# Altium PCB TemperatureController.PcbDoc
Units mil, origin at the board's own origin, x right, y up, seen from the top; angles counter-clockwise.
Board outline 4500 x 3715 mil, 2 copper layers (Top Layer, Bottom Layer); 24 components, 18 nets, 92 pads, 7 vias.
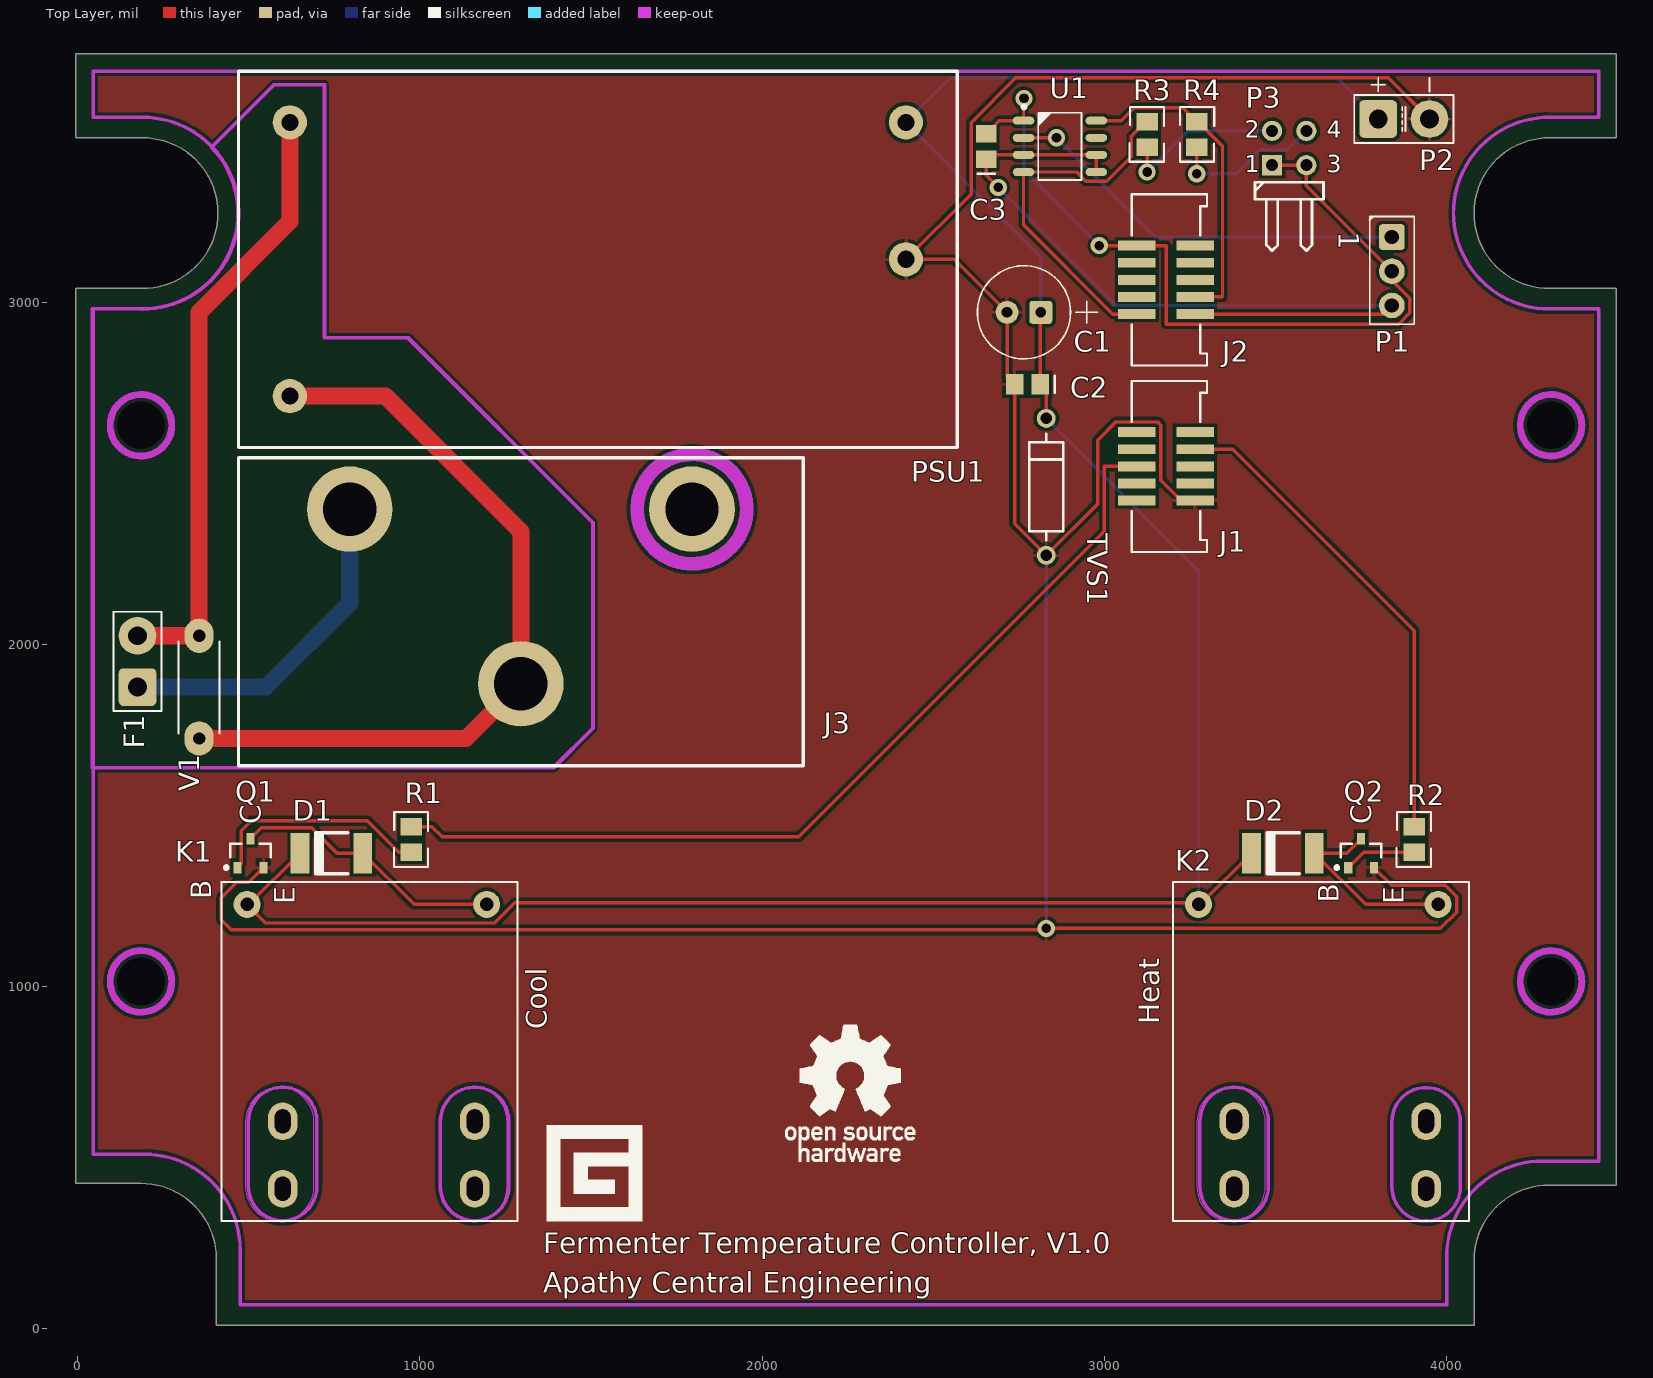
[diagram p0: Top Layer view]
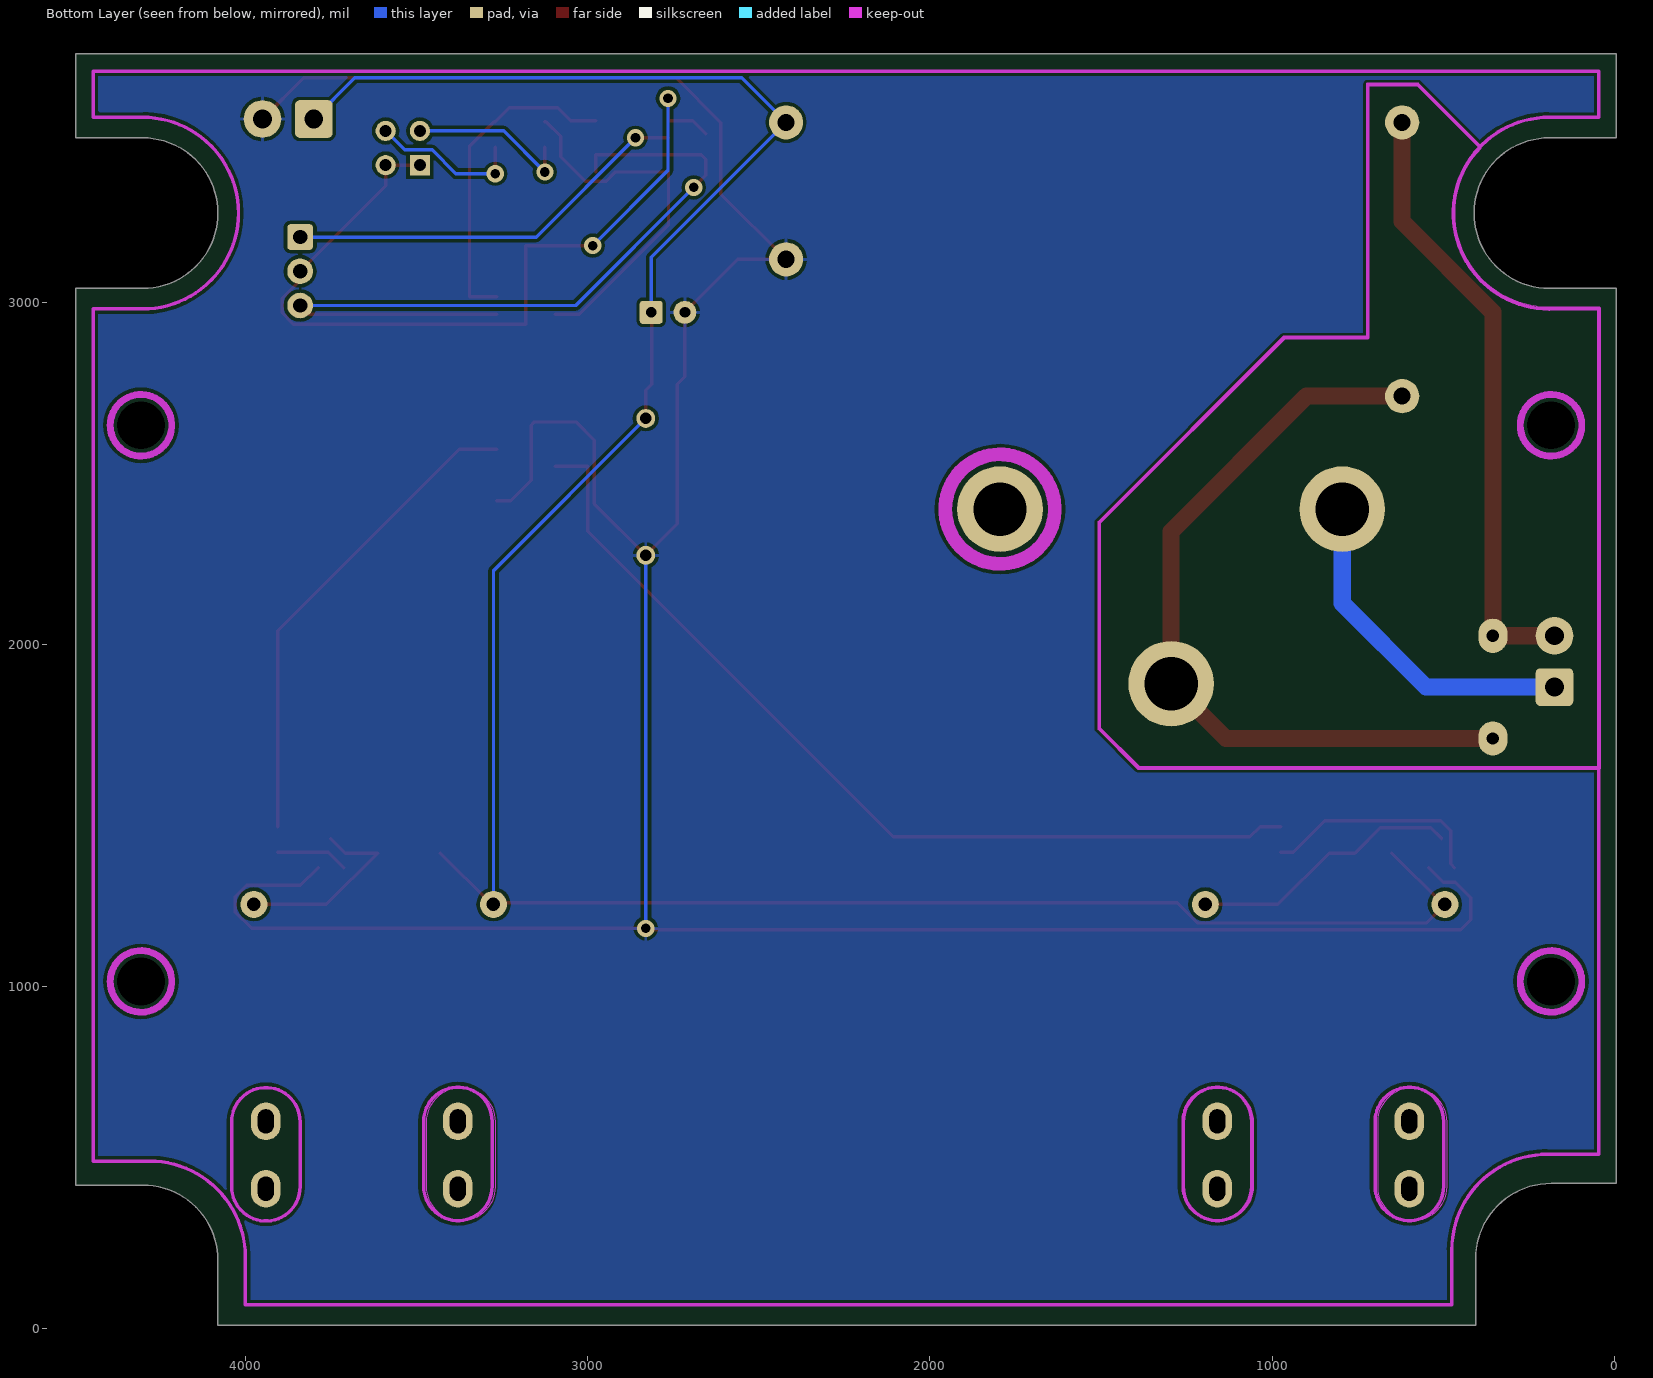
[diagram p1: Bottom Layer view, seen from below]

## Layer stack, top to bottom
Top Layer: signal copper 1.4
Dielectric: core 12.6, FR-4, Dk 4.8
Bottom Layer: signal copper 1.4

## Board outline
-5,425 185,425 cw(c185,205) 405,205 405,10 4080,10 4080,200 cw(c4300,200) 4300,420 4495,420 4495,3040 4300,3040 cw(c4300,3260) 4080,3260 cw(c4300,3260) 4300,3480 4495,3480 4495,3725 -5,3725 -5,3480 190,3480 cw(c190,3260) 410,3260 cw(c190,3260) 190,3040 -5,3040

## Design rules (kind name [scope] priority, off if disabled: settings)
Clearance [All] p1: gap=10
HoleSize [All] p1: absolutevalues=TRUE maxlimit=160 minlimit=1 maxpercent=80.000 minpercent=20.000
PolygonConnect [All] p1: connectstyle=Relief reliefconductorwidth=10 reliefentries=4 polygonreliefangle="90 Angle" airgapwidth=10
RoutingVias [All] p1: holewidth=32 width=62 viastyle="Through Hole" minholewidth=28 minwidth=50 maxholewidth=28 maxwidth=50
SilkToSolderMaskClearance [IsPad] p1: minsilkscreentomaskgap=9 clearancetoexposedcopper=TRUE
SolderMaskExpansion [All] p1: expansion=4
Width [(InNet('AC-LINE') OR InNet('AC-NEUTRAL') OR InNet('AC_LINE PRE-FUSE'))] p1: maxlimit=60 minlimit=50 preferedwidth=50 minimp=50.000000 maximp=50.000000 favimp=50.000000
26 further rules are at their usual default settings.

## Components (designator, comment, footprint, x,y, rotation, side; value= is the part's Value field where it differs from the comment)
C1 "Capacitor, Polarized Axial" CAPAxial680X1220_VERT 2765,2970 r180 top
C2 "Bypass Cap" "0805 [2012]" 2775,2760 r180 top
C3 "Bypass Cap" "0805 [2012]" 2655,3455 r90 top
D1 "SMD Diode" "Diode (3mm X 1mm X 4.65mm) SMD" 650,1390 r90 top
D2 "SMD Diode" "Diode (3mm X 1mm X 4.65mm) SMD" 3430,1390 r90 top
F1 "Panel Mount Fuze" "Off Board Connector" 175,1875 r180 top
J1 "SHF-105-01-J-D-SM" "Samtec SHF-105-01-J-D-SM" 3180,2520 r0 top
J2 "SHF-105-01-J-D-SM" "Samtec SHF-105-01-J-D-SM" 3180,3065 r0 top
J3 "Barrier Strip" "Molex 3 Pos Barrier Strip" 1795,2395 r270 top
K1 "Cool Relay" "Omron G5CA-1A-TP" 845,1240 r0 top
K2 "Heat Relay" "Omron G5CA-1A-TP" 3625,1240 r0 top
P1 "1x3 Header" "1x3 Pos Header" 3775,3250 r0 top
P2 "Barrel Power Plug" "Power Plug" 3875,3535 r90 top
P3 "Header 2X2H" HDR2X2H 3490,3400 r0 top
PSU1 "VSK-S10-12UA" VSK-S10-12UA 620,3525 r0 top
Q1 "MMBT3904" SOT-23 505,1390 r90 top
Q2 "MMBT3904" SOT-23 3750,1390 r90 top
R1 "10k" RES_0805 975,1430 r90 top
R2 "10k" RES_0805 3905,1430 r90 top
R3 "4.7 K" RES_0805 3125,3490 r90 top
R4 "4.7 K" RES_0805 3270,3490 r270 top
TVS1 "P6KE-20A" "DIODE Axial 400 mil" 2830,2460 r90 top
U1 "DS2482-100" DS2482-100 2870,3455 r0 top
V1 "MOV" Varistor_7.62and10mm 355,1875 r90 top

## Footprints (in the part's own frame and the unit in brackets; to place one, negate y for a bottom-side part, rotate by r counter-clockwise, add the part's x,y. Pads: shape width x height; smd on the part's side, far side on the other; paste and mask are expansions set on the pad)
"1x3 Pos Header" [mil] "Connector Header, Single-row 3-position, 0.100\" pitch"
  rrect25% 75x75 hole 42: 1(65,-60)
  round 75 hole 42: 2(65,-160) 3(65,-260)
  silkscreen extent 0,-315 130,0, body extent 8,-310 122,-10, height 267
"0805 [2012]" [mm] "Chip Capacitor; Body 2.0 x 1.2 mm (LxW typ)"
  rect 1.3x1.5 smd: 1(-0.95,0) 2(0.95,0)
  silkscreen extent -2.03,-0.64 -2.03,0.63, body extent -1.52,-0.64 1.52,0.64, height 0.38
CAPAxial680X1220_VERT [mm] "Capacitor, Polarized Axial"
  round 0.508 on Mech14: 0(0,0)
  rrect25% 1.7x1.7 hole 0.8: 1(-1.25,0)
  round 1.7 hole 0.8: 2(1.25,0)
  silkscreen extent -5.45,-3.46 3.46,3.46, body extent -3.37,-3.37 3.37,3.37, height 12.2
"Diode (3mm X 1mm X 4.65mm) SMD" [mil]
  rect 118.11x55 smd: 1(0,0) 2(0,-183.07)
  silkscreen extent -60,-140 60,-45, body extent -65,-187 65,10, height 40
"DIODE Axial 400 mil" [mm] "Diode, Thru-Hole; 2 Leads; 0.4 in Pin Spacing"
  round 1.4 hole 0.85: 1(-5.08,0) 2(5.08,0)
  silkscreen extent -3.94,-1.27 3.94,1.27, body extent -5.33,-1.27 5.33,1.26, height 2.54
DS2482-100 [mm]
  round 1 on Mech14: 0(0,0)
  oval 1.6x0.6 smd paste-2: 1(-2.7,1.905) 2(-2.7,0.635) 3(-2.7,-0.635) 4(-2.7,-1.905) 5(2.7,-1.905) 6(2.7,-0.635) 7(2.7,0.635) 8(2.7,1.905)
  silkscreen extent -2.79,-2.5 1.6,3.05, body extent -3,-2.45 3,2.45, height 1.75
HDR2X2H [mm] "Connector; Header; 2x2 Position; Right Angle"
  rect 1.5x1.5 hole 0.9: 1(0,0)
  round 1.5 hole 0.9: 2(0,2.54) 3(2.54,0) 4(2.54,2.54)
  silkscreen extent -1.27,-6.35 3.81,-1.27
"Molex 3 Pos Barrier Strip" [mil]
  round 250 hole 156: 1(0,-1000) 2(510,-500) 3(0,0)
  silkscreen extent -150,-1325 750,325, body extent -125,-1290 725,310, height 890
"Off Board Connector" [mil] "2 Position Off Board Connector"
  rrect25% 110x110 hole 55: 1(0,0)
  round 110 hole 55: 2(0,-150)
  silkscreen extent -70,-220 70,70
"Omron G5CA-1A-TP" [mm] "Omrom G5CA-1A-TP PCB Relay"
  round 2 hole 1: 1(-8.89,0) 2(8.89,0)
  oval 2.2x2.8 hole 1.2 slot 1.8 at 90 deg: 3(-6.25,-21.1) 3(-6.25,-16.1) 4(8,-21.1) 4(8,-16.1)
  silkscreen extent -10.79,-23.49 11.18,1.65, body extent -10.79,-23.62 11.18,1.65, height 13.3
"Power Plug" [mil]
  rrect25% 110x110 hole 55: V+(0,75)
  round 110 hole 55: V-(0,-75)
  silkscreen extent -70,-145 120,145
RES_0805 [mm] "Resistor -  2 x 1.4 mm (LxDia)"
  rect 1.3x1.6 smd: 1(-0.95,0) 2(0.95,0)
  silkscreen extent -2.03,-1.24 2.03,1.3, body extent -1.4,-0.79 1.4,0.79, height 0.76
"Samtec SHF-105-01-J-D-SM" [mil] "Samtec Gadgeteer Connector"
  rect 110x29 smd: 1(-85,100) 2(85,100) 3(-85,50) 4(85,50) 5(-85,0) 6(85,0) 7(-85,-50) 8(85,-50) 9(-85,-100) 10(85,-100)
  silkscreen extent -100,-250 120,250, body extent -120,-250 120,250
SOT-23 [mm] "SOT23, 3-Leads, Body 2.9x1.3mm, Pitch 0.95mm, Lead Span 2.5mm, IPC High Density"
  rect 0.85x0.6 smd: 1(-1.075,-0.95) 2(-1.075,0.95) 3(1.075,0)
  silkscreen extent -1.2,-1.5 0.7,1.92, body extent -0.7,-1.5 0.7,1.5, height 1.1
Varistor_7.62and10mm [mil] "MOV Thru-Hole, Radial; Body 6.8 x 3 mm (WxT) Pin Spacing 7.62 mm (typ)"
  oval 100x85 hole 36: 1(-150,0) 2(150,0)
  silkscreen extent -135,-60 133,60, body extent -216,-70 216,68, height 472
VSK-S10-12UA [mil] "CUI AC-DC Power Supply"
  round 100 hole 50: 1(0,0) 2(0,-800) 3(1800,0) 4(1800,-400)
  silkscreen extent -150,-950 1950,150, body extent -155,-955 1955,155, height 748

## Part data
C1: "120 uF Aluminum Electrolytic Capacitor (Axial)"
C2 C3: library part "Bypass Capacitor", "0.1 uF Capacitor SMD 0805"
D1 D2: library part diode, "Diode, SMD, 0805"
F1: library part "Panel Mount Fuse Holder", "Panel Mount Fuze Holder"
J1 J2: "Samtec 10 pin .050 pitch shrouded connector"
J3: library part "Molex 3 Pos Barrier Strip", "Molex 3 Pos Barrier Strip"
K1 K2: library part G5CA-1A-TP-E, "Omron G5CA-1A-TP-E PCB Mount 12 V Relay with 15A contacts"
P1: "Fan Connector Header, Single-row 3-position, 0.100\" pitch"
P2: library part "Barrel Plug", "Power Plug"
P3: "Header, 2-Pin, Dual row, Right Angle"
PSU1: "AC/DC 12V Sealed PCB Mount Power Supply"
Q1 Q2: "NPN General Purpose Amplifier"
R1 R2 R3 R4: library part "RES 0805"
TVS1: library part "TVS Diode", "Diode, TVS, Axial"
U1: library part DS2482, "I2C to 1-Wire Bridge, SO(150mil)"
V1: "Metal Oxide Varistor"

## Free pads (board coordinates)
  round 130 hole 140 unplated: M1(185,1015) M1(185,2640) M1(4305,1015) M1(4305,2640)

## Via types
v1: diameter 50, hole 28, Top Layer to Bottom Layer, 7 vias

## Nets (pads, with @x,y where several pads share a name; then routed paths per layer and width w, separated by ;. In a path a pad name is that pad's centre, name@x,y a point inside that pad or via, vN(x,y) a via of type N, cw(c..) or ccw(c..) an arc to the next point about the centre after c; other vN are vias at no path point)
"1WIRE IO": P1.1 U1.2 | length 1196.4
  Top Layer w10: U1.2 v1(2860,3480)
  Bottom Layer w10: v1(2860,3480) 3150,3190 P1.1
AC-LINE: F1.2 PSU1.1 V1.2 | length 1789.8
  Top Layer w50: F1.2 V1.2 355,2970.48 620,3235.48 PSU1.1
AC-NEUTRAL: J3.2 PSU1.2 V1.1 | length 2289.9
  Top Layer w50: V1.1 1135,1725 J3.2 1295,2330 900,2725 PSU1.2
"AC_LINE PRE-FUSE": F1.1 J3.1 | length 996.5
  Bottom Layer w50: F1.1 550,1875 795,2120 J3.1
GND: C1.2 C2.2 J1.10 P2.V- PSU1.4 Q1.1 Q2.1 TVS1.1 | length 9212.6
  Top Layer w10: Q1.1 499.72,1305 465,1305 420,1260 420,1195 449.37,1165.63 2825.63,1165.63 v1(2830,1170) 3981.89,1170 4029.37,1217.48 4029.37,1262.52 3996.08,1295.81 3839.26,1295.81 Q2.1 ; J1.10 3224.29,2420 3165,2479.29 3165,2640.71 3156.21,2649.5 3033.79,2649.5 2980,2595.71 2980,2410 TVS1.1 2737.6,2352.4 C2.2 2715.79,2781.81 C1.2 2560.79,3125 PSU1.4 2610.47,3315.47 2610.47,3524.21 2741.27,3655 3830,3655 P2.V-
  Bottom Layer w10: v1(2830,1170) TVS1.1
GND_3V3: C3.1 J2.10 P1.3 U1.3 U1.5 U1.6 | length 2351.8
  Top Layer w10: v1(2690,3335) 2655,3370 C3.1 2667.4,3430 U1.3 U1.6 U1.5 ; J2.10 3815,2965 P1.3
  Bottom Layer w10: v1(2690,3335) 3035,2990 P1.3
NetD1_2: D1.2 K1.2 Q1.3 | length 796.4
  Top Layer w10: Q1.3 505,1433.11 535.94,1464.06 683.71,1464.06 757.77,1390 D1.2 983.07,1240 K1.2
NetD2_2: D2.2 K2.2 Q2.3 | length 578.5
  Top Layer w10: Q2.3 3707.68,1390 D2.2 3763.07,1240 K2.2
NetJ1_4: J1.4 R2.2 | length 1432.1
  Top Layer w10: J1.4 3375,2570 3905,2040 R2.2
NetJ1_5: J1.5 R1.2 | length 2692.2
  Top Layer w10: R1.2 1035,1467.4 1065,1437.4 2107.4,1437.4 3000,2330 3000,2520 J1.5
NetP3_2: P3.2 R3.1 | length 487.3
  Top Layer w10: v1(3125,3380) R3.1
  Bottom Layer w10: v1(3125,3380) 3245,3500 P3.2
NetP3_4: P3.4 R4.2 | length 449.4
  Top Layer w10: v1(3270,3375) R4.2
  Bottom Layer w10: v1(3270,3375) 3384.73,3375 3454.26,3444.53 3534.53,3444.53 P3.4
NetQ1_2: Q1.2 R1.1 | length 658.6
  Top Layer w10: Q1.2 478.19,1358.27 478.19,1455.27 506.98,1484.06 846.78,1484.06 938.24,1392.6 R1.1
NetQ2_2: Q2.2 R2.1 | length 211
  Top Layer w10: Q2.2 3757.52,1392.6 R2.1
SCL: J2.9 R3.2 U1.4 | length 1072.8
  Top Layer w10: J2.9 3025,2965 2763.7,3226.3 U1.4 2918.7,3380 2945.51,3353.19 3007.09,3353.19 3078.5,3424.6 3078.5,3484.4 3121.5,3527.4 R3.2
SDA: J2.8 R4.1 U1.8 | length 951.8
  Top Layer w10: U1.8 3049.3,3530 3087.29,3567.99 3229.41,3567.99 R4.1 3273.5,3527.4 3345,3455.9 3345,3015 J2.8
VCC_3V3: C3.2 J2.1 P1.2 P3.1 P3.3 U1.1 | length 2518.3
  Top Layer w10: C3.2 2692.6,3530 U1.1 2763.7,3593.7 v1(2765,3595) ; v1(2985,3165) J2.1 3180,3165 3180.5,3164.5 3180.5,2935.5 3859.75,2935.5 3892.5,2968.25 3892.5,3011.75 3840,3064.25 P1.2 3590,3340 P3.3 P3.1
  Bottom Layer w10: v1(2765,3595) 2765,3385 v1(2985,3165)
VCC_12V: C1.1 C2.1 D1.1 D2.1 K1.1 K2.1 P2.V+ PSU1.3 TVS1.2 | length 7407.9
  Top Layer w10: D1.1 500,1240 K1.1 549.37,1185.63 1217.52,1185.63 1276.89,1245 3270,1245 K2.1 ; C1.1 2812.4,2968.19 C2.1 2830,2742.4 TVS1.2 ; K2.1@3275,1245 3285,1245 D2.1
  Bottom Layer w10: TVS1.2 3275,2215 K2.1 ; C1.1@2830,2954.21 C1.1 2814.21,3130.79 PSU1.3 2550,3655 3680,3655 P2.V+
pads on no net: C1.0 J1.1 J1.2 J1.3 J1.6 J1.7 J1.8 J1.9 J2.2 J2.3 J2.4 J2.5 J2.6 J2.7 J3.3 K1.3 K1.4 K2.3 K2.4 U1.0 U1.7

## Polygon pours and split planes (outlines as drawn)
GND on Top Layer "Bottom Layer -Gnd" (solid, pour order 6): 45,510.04 194.96,510.04 cw(c194.96,230) 475,230 475,70 4000,70 4000,210 cw(c4280.04,210) 4280.04,490.04 4445,490.04 4445,2980 4300.04,2980 4300,2979.96 cw(c4300,3260) 4300,3540.04 4445,3540 4445,3675 45,3675 45,3540.04 190,3540.04 cw(c190,3260) 190,2979.96 45.04,2979.96 45,2979.91
GND on Bottom Layer "Bottom Layer -Gnd" (solid, pour order 4): 45,510.04 194.96,510.04 cw(c194.96,230) 475,230 475,70 4000,70 4000,210 cw(c4280.04,210) 4280.04,490.04 4445,490.04 4445,2980 4300.04,2980 4300,2979.96 cw(c4300,3260) 4300,3540.04 4445,3540 4445,3675 45,3675 45,3540.04 190,3540.04 cw(c190,3260) 190,2979.96 45.04,2979.96 45,2979.91

## Keep-outs
Keep-Out Layer:
  circle w40: c1795,2395 r160
  circle w20: c4305,1015 r90
  circle w20: c185,1015 r90
  circle w20: c4305,2640 r90
  circle w20: c185,2640 r90
  pour cut-out: 45,1634.98 cw(c45,1640) 39.98,1640 39.98,2979.91 cw(c45,2979.91) 41.48,2983.48 cw(c45.04,2979.96) 45.04,2984.97 190,2984.97 cw(c190,2979.96) 191.84,2984.62 ccw(c190,3260) 465.39,3260 ccw(c190,3260) 389.53,3449.8 cw(c393.17,3453.26) 390.74,3457.64 cw(c395,3455) 391.45,3458.55 571.45,3638.55 571.44,3638.53 cw(c575,3635) 575,3640.02 720,3640.02 cw(c720,3635) 725.01,3635 725.01,2900.02 965,2900.02 cw(c965,2895) 968.56,2898.53 968.55,2898.55 1508.55,2358.55 1508.53,2358.56 cw(c1505,2355) 1510.01,2355 1510.01,1755 cw(c1505,1755) 1508.53,1751.44 1508.55,1751.45 1393.55,1636.45 1393.56,1636.47 cw(c1390,1640) 1390,1634.98
  pour cut-out: 3840,415 ccw(c3940,415) 4040,415 4040,605 ccw(c3940,605) 3840,605
  pour cut-out: 3270,415 ccw(c3370,415) 3470,415 3470,605 ccw(c3370,605) 3270,605
  pour cut-out: 490,415 ccw(c590,415) 690,415 690,605 ccw(c590,605) 490,605
  pour cut-out: 1055,415 ccw(c1155,415) 1255,415 1255,605 ccw(c1155,605) 1055,605
  lines w10: 45,510 45,2979.91 ; 45,510.04 194.96,510.04 cw(c194.96,230) 475,230 475,70 4000,70 4000,210 cw(c4280.04,210) 4280.04,490.04 4445,490.04 4445,2980 4300.04,2980 ; 190,2979.6 ccw(c190,3260) 393.17,3453.26 ; 323.23,3013.27 ccw(c190,3260) 325.32,3505.59 ; 395,3455 575,3635 720,3635 720,2895 965,2895 1505,2355 1505,1755 1390,1640 45,1640 45,2979.91 ; 4300,2979.96 cw(c4300,3260) 4300,3540.04 4445,3540 4445,3675 45,3675 45,3540.04 190,3540.04 cw(c190,3260) 190,2979.96 45.04,2979.96 45,2979.91 ; 498.94,416.14 ccw(c598.94,416.14) 698.94,416.14 698.94,606.14 ccw(c598.94,606.14) 498.94,606.14 498.94,416.14 ; 1059.96,416.14 ccw(c1159.96,416.14) 1259.96,416.14 1259.96,606.14 ccw(c1159.96,606.14) 1059.96,606.14 1059.96,416.14 ; 3278.94,416.14 ccw(c3378.94,416.14) 3478.94,416.14 3478.94,606.14 ccw(c3378.94,606.14) 3278.94,606.14 3278.94,416.14 ; 3840,415 ccw(c3940,415) 4040,415 4040,605 ccw(c3940,605) 3840,605 3840,415

## Silkscreen, mask and mechanical layers (free items; w line width, h text height)
Top Overlay:
  drawing of 1658 lines, arcs and shapes, not listed
  text "Heat" at 3160,890 h60 r90
  text "Cool" at 1370,875 h60 r90
  text "Fermenter Temperature Controller, V1.0" at 1360,221 h60
  text "Apathy Central Engineering" at 1360,106 h60
Mechanical 3:
  the board outline again, w10

## Text inside footprints (layer, text, board x,y; h text height)
P1: Top Overlay "1" at 3685,3205 h60 r270
P3: Top Overlay "3" at 3650,3380 h50; Top Overlay "4" at 3650,3480 h50; Top Overlay "2" at 3410,3480 h50; Top Overlay "1" at 3410,3380 h50
Q1: Top Overlay "C" at 535,1475 h60 r90; Top Overlay "E" at 635,1240 h60 r90; Top Overlay "B" at 390,1255 h60 r90
Q2: Top Overlay "C" at 3780,1475 h60 r90; Top Overlay "E" at 3875,1240 h60 r90; Top Overlay "B" at 3685,1245 h60 r90